# Altium PCB Satellite_4U_Laser_Int_Ext_V11.PcbDoc (part 2 of 2)
Units mm, origin at the board's own origin, x right, y up, seen from the top; angles counter-clockwise.
Board outline 82 x 80 mm, 4 copper layers (L1_TOP, L2_SIGNAL, L3_GND, L4_BOT), stack 1.584 mm thick; 192 components, 101 nets, 642 pads, 592 vias.
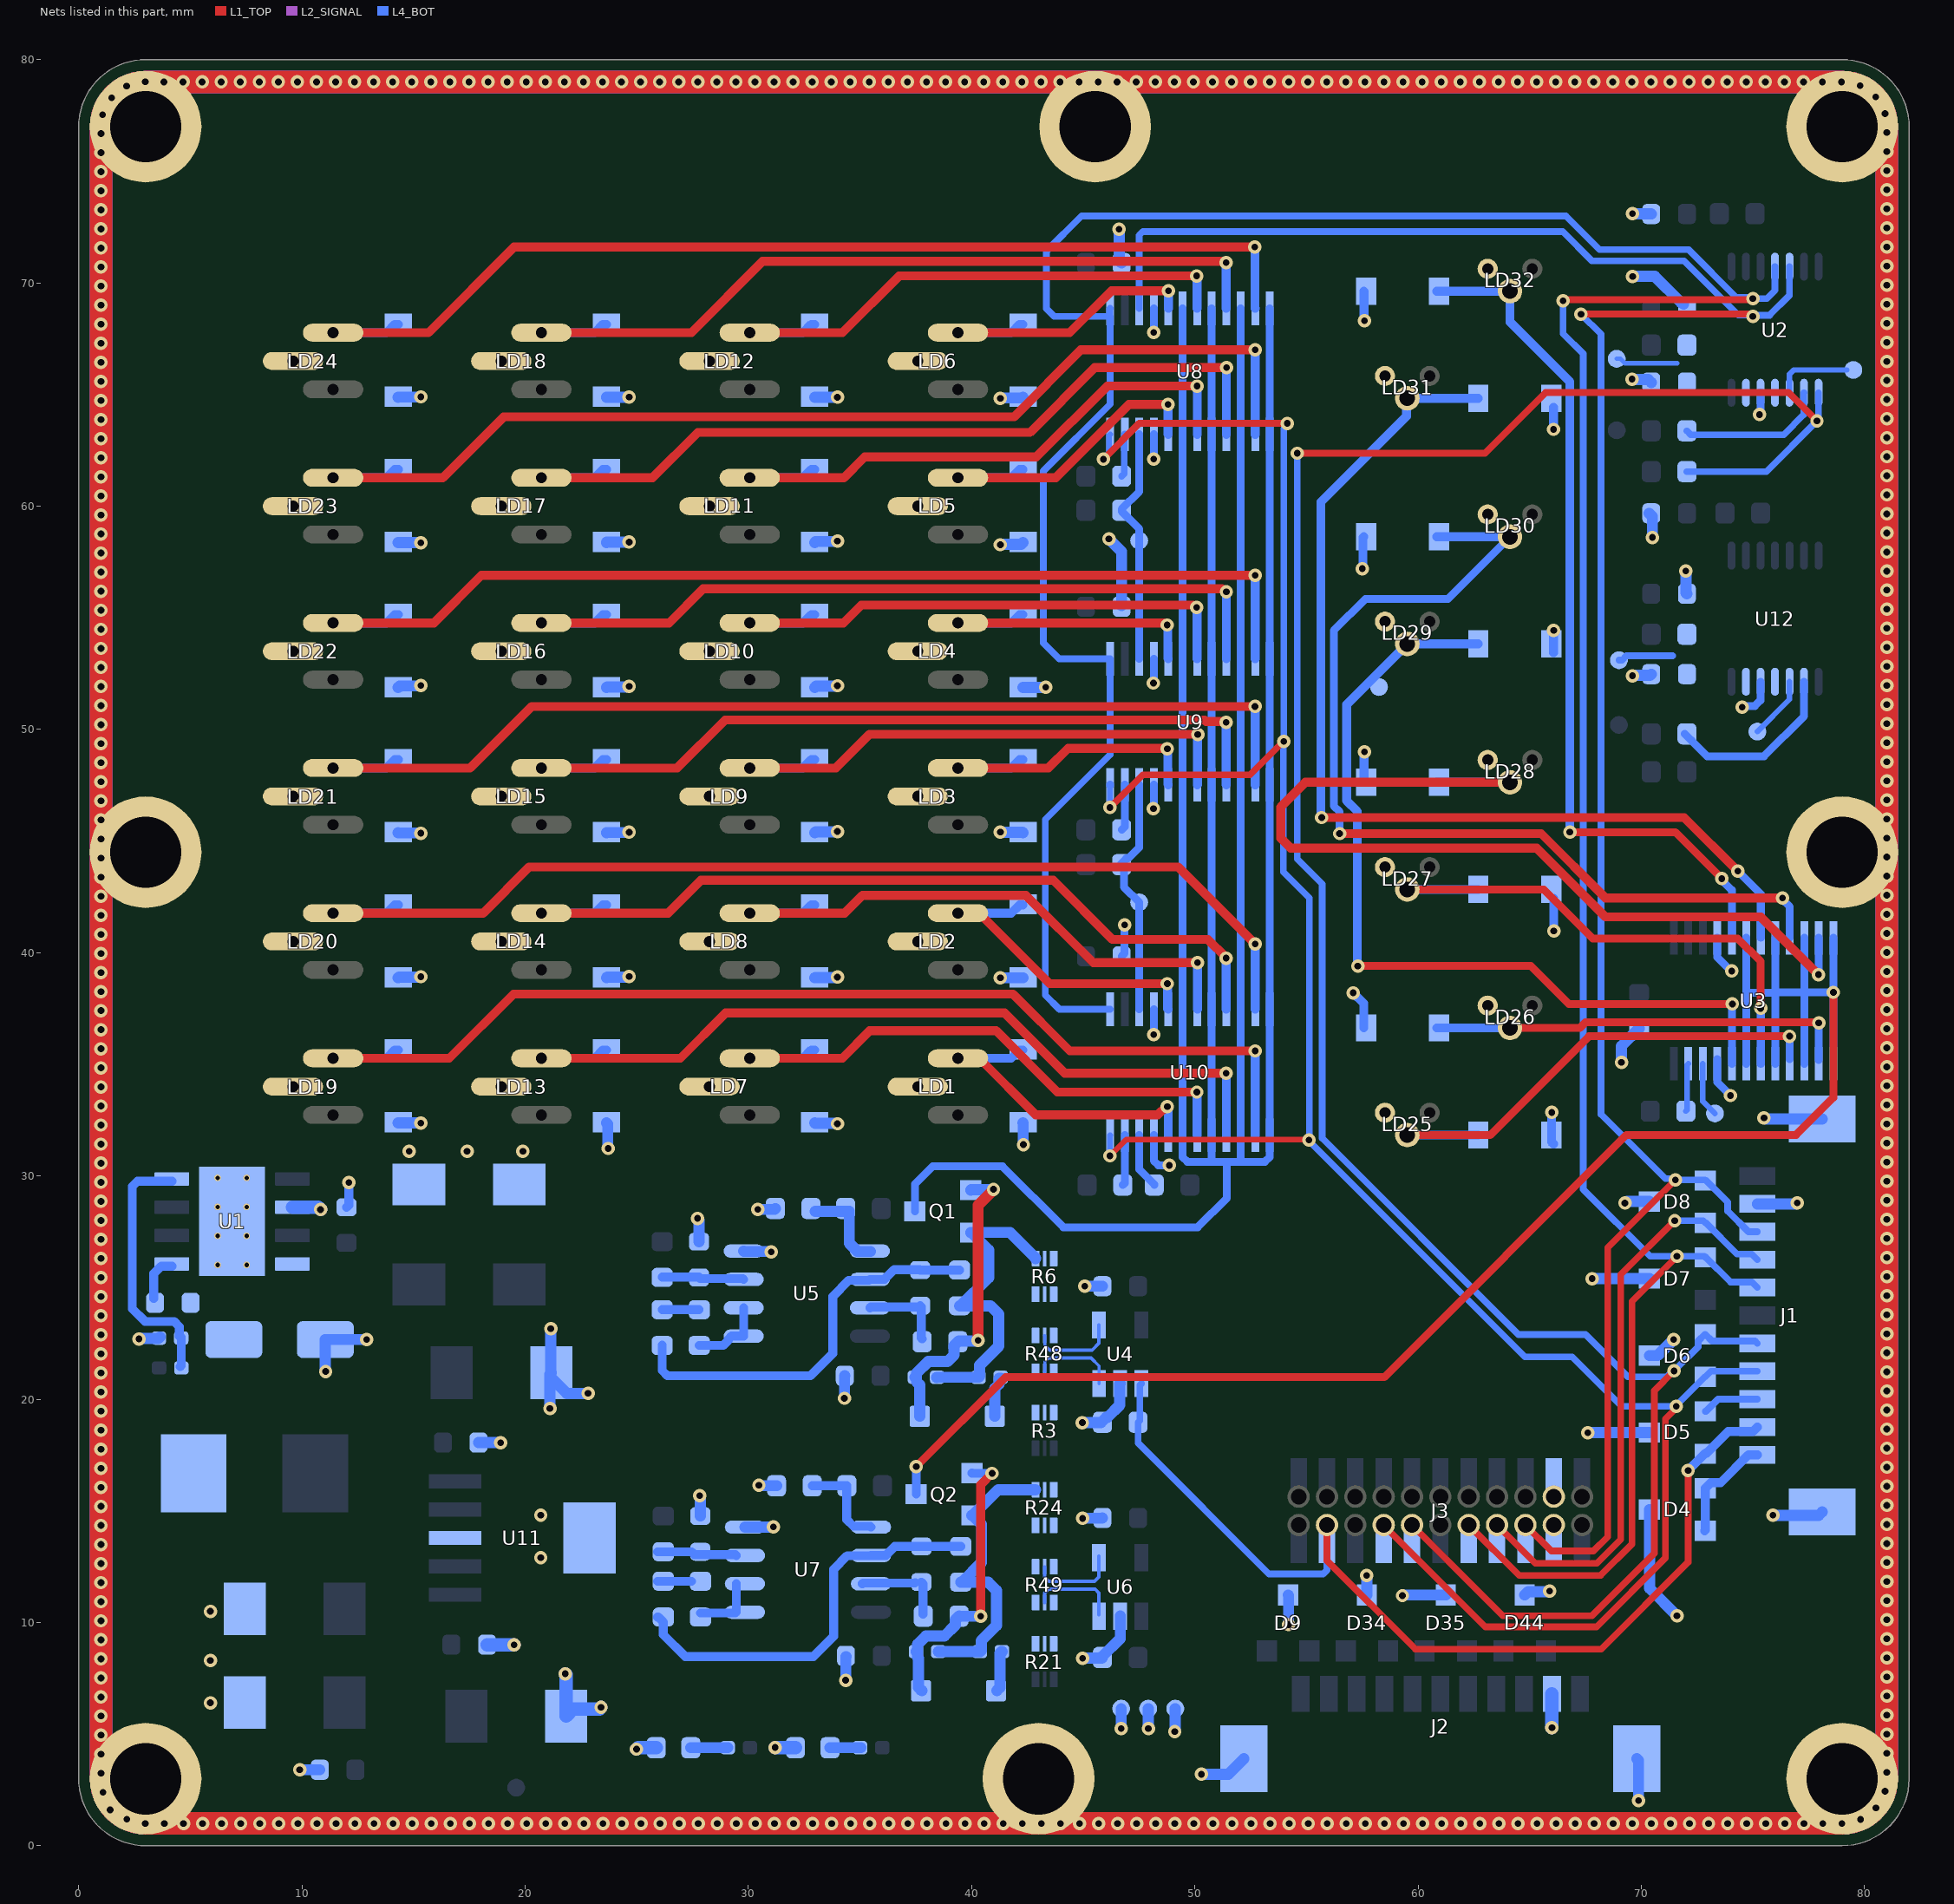
[diagram p4: the nets of this part, all layers, seen from the top]

## Via types
v1: diameter 0.6, hole 0.3, L1_TOP to L4_BOT, tented both sides, 592 vias

## Nets (pads, with @x,y where several pads share a name; then routed paths per layer and width w, separated by ;. In a path a pad name is that pad's centre, name@x,y a point inside that pad or via, vN(x,y) a via of type N, cw(c..) or ccw(c..) an arc to the next point about the centre after c; other vN are vias at no path point) (continued)
GND: C2.1 C3.2 C4.1 C5.1 C6.2 C9.1 C10.1 C14.1 C16.1 C17.2 C18.2 C19.2 C20.1 C21.2 C23.1 C25.1 C26.1 C33.1 C43.1 C49.1 C51.1 C53.1 C55.1 C58.1 C59.1 C60.1 D1.2 D2.1 D3.1 D4.3 D5.3 D6.3 D7.3 D8.3 D9.3 D10.1 D11.1 D12.1 D13.1 D14.1 D15.1 D16.1 D17.1 D18.1 D19.1 D20.1 D21.1 D22.1 D23.1 D24.1 D25.1 D26.1 D27.1 D28.1 D29.1 D30.1 D31.1 D32.1 D33.1 D34.3 D35.3 D36.1 D37.1 D38.1 D39.1 D40.1 D41.1 D42.1 D43.1 D44.3 H1.1 H2.1 H3.1 H4.1 H5.1 H6.1 H7.1 H8.1 J1.2 J1.M1 J1.M2 J2.2 J2.M1 J2.M2 J3.03 J3.04 LD1.2 LD2.2 LD3.2 LD4.2 LD5.2 LD6.2 LD7.2 LD8.2 LD9.2 LD10.2 LD11.2 LD12.2 LD13.2 LD14.2 LD15.2 LD16.2 LD17.2 LD18.2 LD19.2 LD20.2 LD21.2 LD22.2 LD23.2 LD24.2 LD25.1 LD26.1 LD27.1 LD28.1 LD29.1 LD30.1 LD31.1 LD32.1 R4.1 R11.2 R16.2 R23.2 R28.2 TP15.1 TP18.1 TP19.1 U1.6 U1.9 U2.12 U3.4 U3.21 U4.2 U5.4 U6.2 U7.4 U8.4 U8.21 U9.4 U9.21 U10.4 U10.21 U11.3 U11.6 U12.12 | length 1073.3
  L1_TOP w1: H1.1@1,3 ccw(c3,3) 3,1 79,1 ccw(c79,3) H3.1@81,2.996 ; H1.1@1,3.005 1,10.075 1,10.929 1,24.593 1,25.447 1,39.965 1,40.819 1,54.483 1,55.337 1,69.001 1,69.855 1,77 cw(c3,77) 3,79 79,79 cw(c79,77) 81,77 81,69.9 81,69.046 81,55.382 81,54.528 81,40.01 81,39.156 81,25.492 81,24.638 81,10.974 81,10.12 H3.1@81,3
  L2_SIGNAL w1: H1.1@1,3 ccw(c3,3) 3,1 79,1 ccw(c79,3) H3.1@81,2.996 ; H1.1@1,3.005 1,10.075 1,10.929 1,24.593 1,25.447 1,39.965 1,40.819 1,54.483 1,55.337 1,69.001 1,69.855 1,77 cw(c3,77) 3,79 79,79 cw(c79,77) 81,77 81,69.9 81,69.046 81,55.382 81,54.528 81,40.01 81,39.156 81,25.492 81,24.638 81,10.974 81,10.12 H3.1@81,3
  L4_BOT w0.35: C55.1@46.721,39.836 46.857,39.971 v1(46.857,41.241) ; v1(48.147,46.445) 48.159,46.457 U9.21@48.159,47.523 ; v1(48.148,52.074) 48.159,52.086 U9.4@48.159,53.162 ; v1(48.157,62.103) 48.159,62.106 U8.21@48.159,63.221 ; U10.21@48.159,31.826 48.159,30.681 48.364,30.476 v1(48.854,30.476) ; v1(48.158,36.328) 48.159,36.329 U10.4@48.159,37.465 ; U8.4@48.159,68.859 48.159,67.785 v1(48.163,67.781) ; U3.21@73.406,35.223 U3.21@73.406,35.023 73.406,34.194 v1@73.99,33.61 ; U3.4@73.406,40.662 73.406,39.795 v1@74.023,39.177 ; v1(74.522,51.001) 74.569,51.048 75.092,51.048 75.341,51.297 U12.12@75.341,52.135 ; v1(75.3,64.1) 75.3,64.114 75.341,64.155 U2.12@75.341,65.08
  L4_BOT w0.4: C2.1@12,28.6 12.1,28.7 v1(12.1,29.7) ; v1(57.1,38.2) 57.57,37.73 D42.1@57.57,36.63 ; v1(57.5,57.2) 57.535,57.235 57.535,58.595 D38.1@57.57,58.63 ; D40.1@57.57,47.63 57.585,47.645 57.585,48.985 v1(57.6,49) ; D36.1@57.57,69.63 57.585,69.615 57.585,68.315 v1(57.6,68.3) ; v1(65.992,32.846) 65.981,32.835 65.981,31.519 D43.1@66.07,31.43 ; v1(66.068,63.439) 66.07,63.441 D37.1@66.07,64.43 ; D41.1@66.07,42.43 66.076,42.424 66.076,40.975 v1(66.082,40.969) ; D39.1@66.07,53.43 66.07,54.429 v1(66.078,54.437)
  L4_BOT w0.5: v1(2.7,22.7) 2.719,22.719 3.572,22.719 R4.1@3.641,22.788 ; v1(9.9,3.4) C4.1@10.799,3.4 ; v1(11.065,21.242) 11.049,21.258 D1.2@11.049,22.671 12.896,22.671 v1(12.898,22.67) ; D31.1@14.314,32.373 14.316,32.371 v1(15.33,32.369) v1(15.33,32.369) ; D29.1@14.314,38.873 14.345,38.904 15.311,38.904 v1(15.33,38.923) ; D23.1@14.314,45.373 14.326,45.361 15.318,45.361 v1(15.33,45.349) ; D21.1@14.314,51.873 14.387,51.946 15.311,51.946 v1(15.33,51.965) ; D15.1@14.314,58.373 14.32,58.367 15.324,58.367 v1(15.33,58.361) ; D13.1@14.314,64.873 14.325,64.884 15.319,64.884 v1(15.33,64.894) ; C20.1@17.914,18.056 18.89,18.056 v1(18.902,18.044) ; v1(21.11,19.58) 21.11,21.118 C21.2@21.177,21.185 21.15,21.212 v1(21.15,23.16) ; C21.2@21.177,20.95 21.867,20.26 v1(22.82,20.26) ; D33.1@23.644,32.373 23.701,32.316 23.701,31.249 v1(23.72,31.23) ; D28.1@23.644,38.873 23.679,38.908 24.641,38.908 v1(24.66,38.927) ; D25.1@23.644,45.373 23.654,45.383 24.65,45.383 v1(24.66,45.393) ; D20.1@23.644,51.873 23.676,51.905 24.641,51.905 v1(24.66,51.924) ; D17.1@23.644,58.373 23.653,58.382 24.651,58.382 v1(24.66,58.39) ; D12.1@23.644,64.873 23.648,64.877 24.656,64.877 v1(24.66,64.881) ; v1(27.72,28.1) 27.79,28.03 C9.1@27.79,27.055 ; v1(27.82,15.68) 27.844,15.656 C14.1@27.844,14.764 ; U5.4@29.791,26.636 29.81,26.617 31.003,26.617 v1(31.02,26.6) ; U7.4@29.845,14.271 31.111,14.271 v1(31.12,14.28) ; v1(30.42,28.5) 31.166,28.5 R16.2@31.207,28.541 ; v1(30.47,16.148) 30.495,16.123 R23.2@31.261,16.123 ; D32.1@32.974,32.373 32.992,32.355 33.972,32.355 v1(33.99,32.337) ; D27.1@32.974,38.873 32.99,38.889 33.974,38.889 v1(33.99,38.905) ; D24.1@32.974,45.373 33.011,45.41 33.971,45.41 v1(33.99,45.429) ; D19.1@32.974,51.873 33.039,51.938 33.971,51.938 v1(33.99,51.957) ; D16.1@32.974,58.373 33.019,58.418 33.971,58.418 v1(33.99,58.437) ; D11.1@32.974,64.873 32.976,64.875 33.988,64.875 v1(33.99,64.878) ; v1(34.3,20.04) 34.309,20.049 34.309,21.039 C10.1@34.318,21.048 ; v1(34.36,7.41) 34.366,7.416 34.366,8.463 C33.1@34.372,8.469 ; v1(41.288,45.406) 41.304,45.389 42.288,45.389 D22.1@42.304,45.373 ; v1(41.288,58.271) 41.307,58.29 42.221,58.29 D14.1@42.304,58.373 ; v1(41.288,64.828) 41.307,64.848 42.279,64.848 D10.1@42.304,64.873 ; v1(41.288,38.874) D26.1@42.304,38.873 ; D30.1@42.304,32.373 42.312,32.365 42.312,31.408 v1(42.32,31.4) ; D18.1@42.304,51.873 42.314,51.883 43.31,51.883 v1(43.32,51.893) ; v1(44.96,18.95) 44.967,18.957 45.801,18.957 46.033,19.189 46.088,19.189 46.641,19.741 46.641,20.682 U4.2@46.661,20.702 ; v1(44.97,8.39) 44.988,8.408 45.839,8.408 R28.2@45.858,8.427 45.858,8.477 46.661,9.28 U6.2@46.661,10.283 ; v1(44.97,14.66) 44.98,14.671 45.848,14.671 C43.1@45.858,14.681 ; v1(45.07,25.06) C23.1@45.858,25.06 ; v1(46.151,58.532) 46.722,57.961 C53.1@46.722,55.549 ; v1(46.6,72.4) 46.619,72.381 46.619,70.992 C49.1@46.722,70.89 ; v1(46.7,5.25) TP15.1@46.7,6.139 ; TP19.1@47.914,6.139 47.916,6.137 47.916,5.252 v1(47.918,5.25) ; v1(49.1,5.115) 49.114,5.129 49.114,6.126 TP18.1@49.127,6.139 ; v1(50.3,3.2) 51.5,3.2 J2.M2@52.2,3.9 ; D9.3@54.18,11.229 54.2,11.209 v1(54.2,9.9) ; v1(57.7,12.1) 57.706,12.094 57.706,11.235 D34.3@57.713,11.229 ; v1(59.3,11.2) 59.327,11.2 59.356,11.229 D35.3@61.246,11.229 ; D44.3@64.779,11.229 64.931,11.381 65.881,11.381 v1(65.9,11.4) ; v1(67.6,18.5) 67.603,18.503 70.369,18.503 D5.3@70.372,18.505 ; v1(67.8,25.4) D7.3@70.372,25.4 ; v1(69.112,35.085) 69.112,35.812 C51.1@69.9,36.6 ; v1(69.267,28.783) 69.294,28.783 69.368,28.857 70.363,28.857 D8.3@70.372,28.848 ; v1(69.585,65.688) 69.605,65.669 70.316,65.669 C25.1@70.447,65.538 ; v1(69.6,52.4) 69.619,52.419 70.392,52.419 C59.1@70.447,52.474 ; v1(69.6,73.1) 69.607,73.093 70.44,73.093 C16.1@70.447,73.085 ; v1(69.612,70.291) 69.621,70.3 70.6,70.3 71.788,69.112 71.897,69.112 C26.1@71.897,69.048 ; J2.M1@69.8,3.9 69.877,3.823 v1(69.877,2.023) ; C58.1@70.355,59.677 70.5,59.532 v1(70.5,58.6) ; D4.3@70.372,15.058 70.372,11.528 v1(71.6,10.3) ; D6.3@70.372,21.953 70.73,21.953 v1(71.448,22.67) ; v1@72.008,57.092 72.008,56.115 C60.1@72.047,56.076 ; J1.2@75.2,28.75 76.942,28.75 v1(76.984,28.793) ; v1(75.5,32.6) 75.527,32.6 75.577,32.55 J1.M1@78.1,32.55 ; v1(75.9,14.8) 77.95,14.8 J1.M2@78.1,14.95
  L4_BOT w0.6: U1.6@9.573,28.598 10.729,28.598 v1(10.832,28.494) ; C5.1@18.295,9.006 18.3,9 v1(19.5,9) ; v1(21.8,7.7) 21.835,7.665 C19.2@21.835,5.8 22.159,6.124 23.324,6.124 v1(23.4,6.2) ; v1(24.991,4.325) 25.056,4.39 D3.1@25.873,4.39 ; v1(31.2,4.4) 32.099,4.4 D2.1@32.109,4.39 ; v1(66,5.284) J2.2@66,6.8
  L4_BOT w1: H1.1@1,3 ccw(c3,3) 3,1 79,1 ccw(c79,3) H3.1@81,2.996 ; H1.1@1,3.005 1,10.075 1,10.929 1,24.593 1,25.447 1,39.965 1,40.819 1,54.483 1,55.337 1,69.001 1,69.855 1,77 cw(c3,77) 3,79 79,79 cw(c79,77) 81,77 81,69.9 81,69.046 81,55.382 81,54.528 81,40.01 81,39.156 81,25.492 81,24.638 81,10.974 81,10.12 H3.1@81,3
  other v1: 2.986,0.996 3.84,0.997 4.694,0.997 5.548,0.997 6.402,0.997 7.256,0.997 8.11,0.997 8.964,0.997 9.818,0.997 10.672,0.997 11.526,0.997 12.38,0.997 13.234,0.997 14.088,0.997 14.942,0.997 15.796,0.997 16.65,0.997 17.504,0.997 18.358,0.997 19.212,0.997 20.066,0.997 20.92,0.997 21.774,0.997 22.628,0.997 23.482,0.997 24.336,0.997 25.19,0.997 26.044,0.997 26.898,0.997 27.752,0.997 28.606,0.997 29.46,0.997 30.314,0.997 31.168,0.997 32.022,0.997 32.876,0.997 33.73,0.997 34.584,0.997 35.438,0.997 36.292,0.997 37.146,0.997 38,0.997 38.854,0.997 39.708,0.997 40.562,0.997 41.416,0.997 42.27,0.997 43.124,0.997 43.978,0.997 44.832,0.997 45.686,0.997 46.54,0.997 47.394,0.997 48.248,0.997 49.102,0.997 49.956,0.997 50.81,0.997 51.664,0.997 52.518,0.997 53.372,0.997 54.226,0.997 55.08,0.997 55.934,0.997 56.788,0.997 57.642,0.997 58.496,0.997 59.35,0.997 60.204,0.997 61.058,0.997 61.912,0.997 62.766,0.997 63.62,0.997 64.474,0.997 65.328,0.997 66.182,0.997 67.036,0.997 67.89,0.997 68.744,0.997 69.598,0.997 70.452,0.997 71.306,0.997 72.16,0.997 73.014,0.997 73.868,0.997 74.722,0.997 75.576,0.997 76.43,0.997 77.284,0.997 78.138,0.997 78.992,0.997 79.827,1.178 2.154,1.186 1.408,1.602 80.511,1.689 1.089,2.394 80.922,2.438 0.997,3.243 81.003,3.288 0.997,4.097 81.003,4.142 0.997,4.951 81.003,4.996 0.997,5.805 81.003,5.85 5.9,6.4 0.997,6.659 81.003,6.704 0.997,7.513 81.003,7.558 5.9,8.3 0.997,8.367 81.003,8.412 0.997,9.221 81.003,9.266 0.997,10.075 81.003,10.12 5.9,10.5 0.997,10.929 81.003,10.974 0.997,11.783 81.003,11.828 0.997,12.637 81.003,12.682 20.7,12.9 0.997,13.491 81.003,13.536 0.997,14.345 81.003,14.39 20.7,14.8 0.997,15.199 81.003,15.244 0.997,16.053 81.003,16.098 0.997,16.907 81.003,16.952 0.997,17.761 81.003,17.806 0.997,18.615 81.003,18.66 0.997,19.469 81.003,19.514 0.997,20.323 81.003,20.368 0.997,21.177 81.003,21.222 0.997,22.031 81.003,22.076 0.997,22.885 81.003,22.93 0.997,23.739 81.003,23.784 0.997,24.593 81.003,24.638 0.997,25.447 81.003,25.492 0.997,26.301 81.003,26.346 0.997,27.155 81.003,27.2 0.997,28.009 81.003,28.054 0.997,28.863 81.003,28.908 0.997,29.717 81.003,29.762 0.997,30.571 81.003,30.616 14.8,31.1 17.4,31.1 19.9,31.1 0.997,31.425 81.003,31.47 0.997,32.279 81.003,32.324 0.997,33.133 81.003,33.178 74,33.6 0.997,33.987 81.003,34.032 0.997,34.841 81.003,34.886 0.997,35.695 81.003,35.74 0.997,36.549 81.003,36.594 0.997,37.403 81.003,37.448 0.997,38.257 81.003,38.302 0.997,39.111 74.053,39.177 81.003,39.156 0.997,39.965 81.003,40.01 0.997,40.819 81.003,40.864 0.997,41.673 81.003,41.718 0.997,42.527 81.003,42.572 0.997,43.381 81.003,43.426 0.997,44.235 81.003,44.28 0.997,45.089 81.003,45.134 0.997,45.943 81.003,45.988 0.997,46.797 81.003,46.842 0.997,47.651 81.003,47.696 0.997,48.505 81.003,48.55 0.997,49.359 81.003,49.404 0.997,50.213 81.003,50.258 0.997,51.067 81.003,51.112 0.997,51.921 81.003,51.966 0.997,52.775 81.003,52.82 0.997,53.629 81.003,53.674 0.997,54.483 81.003,54.528 0.997,55.337 81.003,55.382 0.997,56.191 81.003,56.236 0.997,57.045 72,57.1 81.003,57.09 0.997,57.899 81.003,57.944 0.997,58.753 81.003,58.798 0.997,59.607 81.003,59.652 0.997,60.461 81.003,60.506 0.997,61.315 81.003,61.36 0.997,62.169 81.003,62.214 0.997,63.023 81.003,63.068 0.997,63.877 81.003,63.922 0.997,64.731 81.003,64.776 0.997,65.585 81.003,65.63 0.997,66.439 81.003,66.484 0.997,67.293 81.003,67.338 0.997,68.147 81.003,68.192 0.997,69.001 81.003,69.046 0.997,69.855 81.003,69.9 0.997,70.709 81.003,70.754 0.997,71.563 81.003,71.608 0.997,72.417 81.003,72.462 0.997,73.271 81.003,73.316 0.997,74.125 81.003,74.17 0.997,74.979 81.003,75.024 0.997,75.833 81.003,75.878 0.997,76.687 81.003,76.732 1.072,77.537 80.917,77.581 1.473,78.292 80.498,78.325 2.149,78.813 79.809,78.83 2.981,79.005 3.821,79.003 4.675,79.003 5.529,79.003 6.383,79.003 7.237,79.003 8.091,79.003 8.945,79.003 9.799,79.003 10.653,79.003 11.507,79.003 12.361,79.003 13.215,79.003 14.069,79.003 14.923,79.003 15.777,79.003 16.631,79.003 17.485,79.003 18.339,79.003 19.193,79.003 20.047,79.003 20.901,79.003 21.755,79.003 22.609,79.003 23.463,79.003 24.317,79.003 25.171,79.003 26.025,79.003 26.879,79.003 27.733,79.003 28.587,79.003 29.441,79.003 30.295,79.003 31.149,79.003 32.003,79.003 32.857,79.003 33.711,79.003 34.565,79.003 35.419,79.003 36.273,79.003 37.127,79.003 37.981,79.003 38.835,79.003 39.689,79.003 40.543,79.003 41.397,79.003 42.251,79.003 43.105,79.003 43.959,79.003 44.813,79.003 45.667,79.003 46.521,79.003 47.375,79.003 48.229,79.003 49.083,79.003 49.937,79.003 50.791,79.003 51.645,79.003 52.499,79.003 53.353,79.003 54.207,79.003 55.061,79.003 55.915,79.003 56.769,79.003 57.623,79.003 58.477,79.003 59.331,79.003 60.185,79.003 61.039,79.003 61.893,79.003 62.747,79.003 63.601,79.003 64.455,79.003 65.309,79.003 66.163,79.003 67.017,79.003 67.871,79.003 68.725,79.003 69.579,79.003 70.433,79.003 71.287,79.003 72.141,79.003 72.995,79.003 73.849,79.003 74.703,79.003 75.557,79.003 76.411,79.003 77.265,79.003 78.119,79.003 78.973,79.003
I_LD_EXT: Q2.3 U3.6 U3.8 U3.10 U3.12 U3.13 U3.15 U3.17 U3.19 | length 80.3
  L1_TOP w0.35: v1(37.52,16.98) 41.524,20.984 58.484,20.984 69.334,31.834 76.934,31.834 78.606,33.506 v1(78.606,38.223)
  L4_BOT w0.35: U3.19@74.706,35.023 74.706,35.701 74.706,38.181 ; U3.6@74.706,40.662 74.706,38.181 ; U3.17@76.006,35.023 76.006,38.202 ; U3.8@76.006,40.662 76.006,38.223 ; U3.15@77.306,35.023 77.306,38.223 ; U3.10@77.306,40.662 77.306,38.223 ; U3.13@78.606,35.023 v1(78.606,38.223) ; U3.12@78.606,40.662 v1(78.606,38.223) ; 74.706,38.181 74.727,38.202 76.006,38.202 ; 76.006,38.202 76.006,38.223 ; 76.006,38.223 77.306,38.223 ; 77.306,38.223 v1(78.606,38.223)
  L4_BOT w0.4: Q2.3@37.52,15.746 v1(37.52,16.98)
I_LD_INT: Q1.3 U8.6 U8.8 U8.10 U8.12 U8.13 U8.15 U8.17 U8.19 U9.6 U9.8 U9.10 U9.12 U9.13 U9.15 U9.17 U9.19 U10.6 U10.8 U10.10 U10.12 U10.13 U10.15 U10.17 U10.19 | length 175.3
  L4_BOT w0.35: Q1.3@37.462,28.414 37.462,29.632 38.26,30.43 41.388,30.43 44.118,27.7 50.13,27.7 51.435,29.005 51.435,30.632 ; U8.6@49.459,68.859 49.459,68.284 U8.19@49.459,63.221 49.459,58.947 U9.6@49.459,53.162 49.459,52.587 U9.19@49.459,47.523 49.459,42.494 U10.6@49.459,37.465 49.459,34.646 U10.19@49.459,31.826 49.459,30.84 49.667,30.632 50.767,30.632 ; U9.8@50.759,53.162 U9.17@50.759,47.523 U10.8@50.759,37.465 U10.17@50.759,31.826 50.759,30.64 50.767,30.632 ; U9.8@50.759,53.18 U8.17@50.759,63.203 ; U8.17@50.759,63.221 U8.8@50.759,68.859 ; U8.10@52.059,68.859 U8.15@52.059,63.221 U9.10@52.059,53.162 U9.15@52.059,47.523 U10.10@52.059,37.465 U10.15@52.059,31.826 52.059,30.632 ; U8.12@53.359,68.859 U8.13@53.359,63.221 U9.12@53.359,53.162 U9.13@53.359,47.523 U10.12@53.359,37.465 U10.13@53.359,31.826 53.359,30.85 53.141,30.632 52.059,30.632 ; 50.767,30.632 51.435,30.632 ; 51.435,30.632 52.059,30.632
INT_LASER_ADC: D5.2 J1.10 J3.20 R11.1 U4.1 | length 43.8
  L1_TOP w0.3: J3.20@55.92,14.365 55.92,12.765 59.885,8.8 68.201,8.8 72.1,12.699 v1(72.1,16.804)
  L4_BOT w0.3: U4.1@47.611,20.702 47.534,20.625 47.534,19.04 R11.1@47.458,18.964 47.458,18.039 53.328,12.169 55.744,12.169 55.92,12.345 J3.20@55.92,13.387
  L4_BOT w0.4: v1(72.1,16.804) 72.1,16.809 72.876,17.585 72.926,17.585 73.891,18.55 75,18.55 J1.10@75.2,18.75
LATCH: D6.1 J1.7 J3.14 R13.1 U2.8 | length 111.4
  L1_TOP w0.3: v1(54.584,62.37) 62.997,62.37 65.714,65.088 76.603,65.088 v1(77.872,63.82) ; J3.14@59.73,14.365 63.795,10.3 67.788,10.3 70.586,13.098 70.586,20.383 v1(71.47,21.267)
  L4_BOT w0.3: v1(54.584,62.37) 54.584,44.196 55.71,43.07 55.71,31.683 64.496,22.896 67.5,22.896 69.4,20.996 71.145,20.996 71.416,21.267 v1(71.47,21.267) 72.547,22.343 72.547,22.603 72.847,22.903 D6.1@72.872,22.903 73.172,22.603 75.097,22.603 J1.7@75.2,22.5 ; R13.1@72.047,61.549 75.601,61.549 v1(77.872,63.82) 77.872,63.901 77.941,63.97 U2.8@77.941,65.08
MISO_LD: D8.2 J1.4 J3.08 | length 26.4
  L1_TOP w0.3: J3.08@63.54,14.365 65.254,12.651 68.017,12.651 69.086,13.719 69.086,25.586 v1(71.5,28)
  L4_BOT w0.3: v1(71.5,28) 72.769,28 D8.2@72.872,27.898 72.897,27.898 74.294,26.5 74.95,26.5 J1.4@75.2,26.25
MOSI_LD: D8.1 J1.3 J3.06 U2.5 U8.3 | length 110.8
  L1_TOP w0.3: J3.06@64.81,14.365 65.975,13.2 67.859,13.2 68.5,13.841 68.5,26.784 v1(71.533,29.817) ; v1(67.3,68.6) 67.308,68.608 74.811,68.608 74.919,68.5 v1(75,68.5)
  L4_BOT w0.3: U8.3@47.509,68.859 47.504,68.864 47.504,72.124 47.68,72.3 66.478,72.3 67.79,70.988 71.912,70.988 74.343,68.557 74.943,68.557 v1(75,68.5) 75.05,68.55 75.75,68.55 76.641,69.441 U2.5@76.641,70.73 ; v1(67.3,68.6) 68.2,67.7 68.2,32.751 71.077,29.875 71.476,29.875 v1(71.533,29.817) ; v1@71.533,29.862 71.577,29.817 72.852,29.817 D8.1@72.872,29.798 ; D8.1@72.897,29.798 73.873,28.821 73.873,28.427 74.8,27.5 J1.3@75.2,27.5
NetC1_1: C1.1 D1.1 L1.1 U1.8
NetC1_2: C1.2 U1.1 | length 2
  L4_BOT w0.4: C1.2@3.366,24.522 3.366,25.626 3.698,25.958 U1.1@4.173,25.958
NetC9_2: C9.2 R25.2 U5.3 | length 3.7
  L4_BOT w0.4: R25.2@26.139,25.465 C9.2@27.79,25.465 ; C9.2@27.79,25.455 27.841,25.404 29.753,25.404 U5.3@29.791,25.366
NetC14_2: C14.2 R26.2 U7.3 | length 3.6
  L4_BOT w0.4: R26.2@25.939,13.164 27.463,13.164 27.588,13.039 29.421,13.039 U7.3@29.459,13.001
NetC22_1: C22.1 R7.1 R14.2 U5.6 | length 18
  L4_BOT w0.4: 26.139,21.282 26.373,21.048 32.778,21.048 33.78,22.05 33.78,24.6 34.507,25.327 35.403,25.327 U5.6@35.441,25.366 36.095,25.366 36.53,25.8 37.681,25.8 C22.1@37.696,25.785 R7.1@39.462,25.785 ; 26.139,21.292 R14.2@26.139,22.417
NetC22_2: C22.2 R15.1 U5.7 | length 3.8
  L4_BOT w0.4: U5.7@35.441,24.096 35.479,24.134 37.645,24.134 C22.2@37.696,24.185 37.741,24.14 37.741,22.743 R15.1@37.785,22.699
NetC24_1: C24.1 R17.1 R20.2 U7.6 | length 18.4
  L4_BOT w0.4: R20.2@25.939,10.243 25.968,10.243 26.192,10.019 26.192,9.452 27.17,8.473 32.913,8.473 33.82,9.38 33.82,12.38 34.432,12.992 35.486,12.992 U7.6@35.495,13.001 36.149,13.001 36.553,13.405 C24.1@37.75,13.405 R17.1@39.515,13.405
NetC24_2: C24.2 R22.1 U7.7 | length 3.9
  L4_BOT w0.4: U7.7@35.109,11.731 35.146,11.768 37.459,11.768 C24.2@37.477,11.786 ; C24.2@37.75,11.805 37.826,11.729 R22.1@37.826,10.367
NetD2_2: D2.2 R1.1 | length 1.4
  L4_BOT w0.5: D2.2@33.659,4.39 R1.1@35.038,4.39
NetD3_2: D3.2 R5.1 | length 1.6
  L4_BOT w0.5: D3.2@27.423,4.39 R5.1@29.069,4.39
NetD4_1: D4.1 D4.2 J1.11 | length 4.9
  L4_BOT w0.4: D4.2@72.836,14.107 72.872,14.143 D4.1@72.872,16.008 73.122,16.258 73.558,16.258 74.8,17.5 J1.11@75.2,17.5
NetD5_1: D5.1 J1.9 | length 2.6
  L4_BOT w0.3: D5.1@72.872,19.455 72.897,19.455 73.441,20 J1.9@75.2,20
NetD10_2: D10.2 LD6.1 U8.5 | length 14.1
  L1_TOP w0.4: LD6.1@39.39,67.77 44.392,67.77 46.272,69.65 v1(48.818,69.65)
  L4_BOT w0.4: LD6.1@39.39,67.77 41.776,67.77 42.149,68.143 D10.2@42.304,68.143 ; U8.5@48.809,68.859 48.818,68.868 v1(48.818,69.65)
NetD11_2: D11.2 LD12.1 U8.7 | length 25.6
  L1_TOP w0.4: LD12.1@30.06,67.77 34.21,67.77 36.752,70.312 v1(50.083,70.312)
  L4_BOT w0.4: LD12.1@30.06,67.77 32.446,67.77 32.819,68.143 D11.2@32.974,68.143 ; v1(50.083,70.312) 50.096,70.299 50.096,68.872 U8.7@50.109,68.859
NetD12_2: D12.2 LD18.1 U8.9 | length 37.1
  L1_TOP w0.4: LD18.1@20.73,67.77 27.449,67.77 30.641,70.962 51.297,70.962 51.346,70.913 v1(51.4,70.913)
  L4_BOT w0.4: LD18.1@20.73,67.77 23.116,67.77 23.489,68.143 D12.2@23.644,68.143 ; v1(51.4,70.913) 51.405,70.909 51.405,68.864 U8.9@51.409,68.859
NetD13_2: D13.2 LD24.1 U8.11 | length 48.7
  L1_TOP w0.4: LD24.1@11.4,67.77 15.67,67.77 19.51,71.61 v1(52.688,71.61)
  L4_BOT w0.4: LD24.1@11.4,67.77 13.786,67.77 14.159,68.143 D13.2@14.314,68.143 ; v1(52.688,71.61) 52.698,71.599 52.698,68.87 U8.11@52.709,68.859
NetD14_2: D14.2 LD5.1 U8.20 | length 15.2
  L1_TOP w0.4: LD5.1@39.39,61.27 43.77,61.27 47.05,64.55 v1(48.801,64.55)
  L4_BOT w0.4: LD5.1@39.39,61.27 41.776,61.27 42.149,61.643 D14.2@42.304,61.643 ; v1(48.801,64.55) 48.805,64.546 48.805,63.225 U8.20@48.809,63.221
NetD15_2: D15.2 LD23.1 U8.14 | length 50.5
  L1_TOP w0.4: LD23.1@11.4,61.27 16.312,61.27 19.042,64 41.9,64 44.9,67 v1(52.7,67)
  L4_BOT w0.4: LD23.1@11.4,61.27 13.786,61.27 14.159,61.643 D15.2@14.314,61.643 ; v1(52.7,67) 52.704,66.995 52.704,63.225 U8.14@52.709,63.221
NetD16_2: D16.2 LD11.1 U8.18 | length 27
  L1_TOP w0.4: LD11.1@30.06,61.27 34.28,61.27 35.21,62.2 42.9,62.2 46.078,65.378 v1(50.106,65.378)
  L4_BOT w0.4: LD11.1@30.06,61.27 32.446,61.27 32.819,61.643 D16.2@32.974,61.643 ; v1(50.106,65.378) v1(50.106,65.378) 50.107,63.222 U8.18@50.109,63.221
NetD17_2: D17.2 LD17.1 U8.16 | length 38.8
  L1_TOP w0.4: LD17.1@20.73,61.27 25.701,61.27 27.731,63.3 42.615,63.3 45.518,66.203 v1(51.418,66.203)
  L4_BOT w0.4: LD17.1@20.73,61.27 23.116,61.27 23.489,61.643 D17.2@23.644,61.643 ; U8.16@51.409,63.221 51.413,63.225 51.413,66.199 v1(51.418,66.203)
NetD18_2: D18.2 LD4.1 U9.5 | length 14
  L1_TOP w0.4: LD4.1@39.39,54.77 48.618,54.77 48.711,54.677 v1(48.765,54.677)
  L4_BOT w0.4: LD4.1@39.39,54.77 41.776,54.77 42.149,55.143 D18.2@42.304,55.143 ; v1(48.765,54.677) 48.787,54.655 48.787,53.184 U9.5@48.809,53.162
NetD19_2: D19.2 LD10.1 U9.7 | length 25.8
  L1_TOP w0.4: LD10.1@30.06,54.77 34.26,54.77 35.06,55.57 49.921,55.57 50.03,55.461 v1(50.084,55.461)
  L4_BOT w0.4: LD10.1@30.06,54.77 32.446,54.77 32.819,55.143 D19.2@32.974,55.143 ; v1(50.084,55.461) 50.096,55.449 50.096,53.175 U9.7@50.109,53.162
NetD20_2: D20.2 LD16.1 U9.9 | length 37.4
  L1_TOP w0.4: LD16.1@20.73,54.77 26.449,54.77 27.979,56.3 51.218,56.3 51.358,56.16 v1(51.412,56.16)
  L4_BOT w0.4: LD16.1@20.73,54.77 23.116,54.77 23.489,55.143 D20.2@23.644,55.143 ; U9.9@51.409,53.162 51.41,53.164 51.41,56.159 v1(51.412,56.16)
NetD21_2: D21.2 LD22.1 U9.11 | length 49
  L1_TOP w0.4: LD22.1@11.4,54.77 15.908,54.77 18.038,56.9 v1(52.7,56.9)
  L4_BOT w0.4: LD22.1@11.4,54.77 13.786,54.77 14.159,55.143 D21.2@14.314,55.143 ; v1(52.7,56.9) 52.704,56.896 52.704,53.167 U9.11@52.709,53.162
NetD22_2: D22.2 LD3.1 U9.20 | length 14.4
  L1_TOP w0.4: LD3.1@39.39,48.27 43.444,48.27 44.323,49.149 48.753,49.149 v1(48.768,49.134)
  L4_BOT w0.4: LD3.1@39.39,48.27 41.776,48.27 42.149,48.643 D22.2@42.304,48.643 ; v1(48.768,49.134) 48.789,49.114 48.789,47.544 U9.20@48.809,47.523
NetD23_2: D23.2 LD21.1 U9.14 | length 49
  L1_TOP w0.4: LD21.1@11.4,48.27 17.536,48.27 20.295,51.029 v1(52.699,51.029)
  L4_BOT w0.4: LD21.1@11.4,48.27 13.786,48.27 14.159,48.643 D23.2@14.314,48.643 ; v1(52.699,51.029) 52.704,51.023 52.704,47.529 U9.14@52.709,47.523
NetD24_2: D24.2 LD9.1 U9.18 | length 26
  L1_TOP w0.4: LD9.1@30.06,48.27 33.925,48.27 35.439,49.784 50.123,49.784 v1(50.134,49.773)
  L4_BOT w0.4: LD9.1@30.06,48.27 32.446,48.27 32.819,48.643 D24.2@32.974,48.643 ; U9.18@50.109,47.523 50.121,47.536 50.121,49.76 v1(50.134,49.773)
NetD25_2: D25.2 LD15.1 U9.16 | length 37.5
  L1_TOP w0.4: LD15.1@20.73,48.27 26.807,48.27 28.96,50.423 50.442,50.423 50.507,50.358 51.361,50.358 v1(51.399,50.32)
  L4_BOT w0.4: LD15.1@20.73,48.27 23.116,48.27 23.489,48.643 D25.2@23.644,48.643 ; v1(51.399,50.32) 51.404,50.315 51.404,47.528 U9.16@51.409,47.523
NetD26_2: D26.2 LD2.1 U10.5 | length 14.9
  L1_TOP w0.4: LD2.1@39.39,41.77 40.34,41.77 43.498,38.612 v1(48.768,38.612)
  L4_BOT w0.4: LD2.1@39.39,41.77 41.776,41.77 42.149,42.143 D26.2@42.304,42.143 ; v1(48.768,38.612) 48.784,38.596 48.784,37.49 U10.5@48.809,37.465
NetD27_2: D27.2 LD8.1 U10.7 | length 26.8
  L1_TOP w0.4: LD8.1@30.06,41.77 34.31,41.77 35.11,42.57 42.43,42.57 45.448,39.552 v1(50.121,39.552)
  L4_BOT w0.4: LD8.1@30.06,41.77 32.446,41.77 32.819,42.143 D27.2@32.974,42.143 ; U10.7@50.109,37.465 50.115,37.471 50.115,39.546 v1(50.121,39.552)
NetD28_2: D28.2 LD14.1 U10.9 | length 38.1
  L1_TOP w0.4: LD14.1@20.73,41.77 26.403,41.77 27.873,43.24 43.66,43.24 46.309,40.591 50.595,40.591 51.403,39.783 v1(51.403,39.755)
  L4_BOT w0.4: LD14.1@20.73,41.77 23.116,41.77 23.489,42.143 D28.2@23.644,42.143 ; v1(51.403,39.755) 51.406,39.752 51.406,37.468 U10.9@51.409,37.465
NetD29_2: D29.2 LD20.1 U10.11 | length 49.6
  L1_TOP w0.4: LD20.1@11.4,41.77 18.119,41.77 20.189,43.84 49.251,43.84 v1(52.705,40.386)
  L4_BOT w0.4: LD20.1@11.4,41.77 13.786,41.77 14.159,42.143 D29.2@14.314,42.143 ; v1(52.705,40.386) 52.709,40.382 U10.11@52.709,37.465
NetD30_2: D30.2 LD1.1 U10.20 | length 15
  L1_TOP w0.4: LD1.1@39.39,35.27 40.34,35.27 42.88,32.73 48.338,32.73 48.714,33.105 v1(48.768,33.105)
  L4_BOT w0.4: LD1.1@39.39,35.27 41.776,35.27 42.149,35.643 D30.2@42.304,35.643 ; v1(48.768,33.105) 48.768,33.051 48.809,33.01 U10.20@48.809,31.826
NetD31_2: D31.2 LD19.1 U10.14 | length 50.4
  L1_TOP w0.4: LD19.1@11.4,35.27 16.601,35.27 19.474,38.143 41.857,38.143 44.4,35.6 v1(52.7,35.6)
  L4_BOT w0.4: LD19.1@11.4,35.27 13.786,35.27 14.159,35.643 D31.2@14.314,35.643 ; v1(52.7,35.6) 52.705,35.595 52.705,31.83 U10.14@52.709,31.826
NetD32_2: D32.2 LD7.1 U10.18 | length 26.7
  L1_TOP w0.4: LD7.1@30.06,35.27 34.21,35.27 35.44,36.5 41.1,36.5 43.845,33.755 v1(50.091,33.755)
  L4_BOT w0.4: LD7.1@30.06,35.27 32.446,35.27 32.819,35.643 D32.2@32.974,35.643 ; v1(50.091,33.755) 50.1,33.747 50.1,31.835 U10.18@50.109,31.826
NetD33_2: D33.2 LD13.1 U10.16 | length 38.5
  L1_TOP w0.4: LD13.1@20.73,35.27 26.955,35.27 28.985,37.3 41.473,37.3 44.173,34.6 v1(51.4,34.6)
  L4_BOT w0.4: LD13.1@20.73,35.27 23.116,35.27 23.489,35.643 D33.2@23.644,35.643 ; v1(51.4,34.6) 51.409,34.591 U10.16@51.409,31.826
NetD36_2: D36.2 LD32.3 U3.5 | length 39.1
  L1_TOP w0.35: v1(66.8,45.4) 71.526,45.4 v1(73.61,43.315)
  L4_BOT w0.35: v1(73.61,43.315) 73.61,43.248 74.056,42.802 U3.5@74.056,40.683
  L4_BOT w0.4: D36.2@60.84,69.63 LD32.3@64.12,69.63 64.12,68.24 66.8,65.56 v1(66.8,45.4)
NetD37_2: D37.2 LD31.3 U3.7 | length 46.6
  L1_TOP w0.4: v1(55.684,46.051) 55.685,46.05 71.928,46.05 v1(74.324,43.653)
  L4_BOT w0.35: v1(74.324,43.653) 75.356,42.622 U3.7@75.356,40.662
  L4_BOT w0.4: v1(55.684,46.051) 55.65,46.085 55.65,60.194 59.49,64.034 59.49,64.8 LD31.3@59.52,64.83 D37.2@62.7,64.83
NetD38_2: D38.2 LD30.3 U3.9 | length 45.1
  L1_TOP w0.4: v1(56.485,45.332) 65.516,45.332 68.404,42.444 v1(76.331,42.444)
  L4_BOT w0.35: v1(56.485,45.332) 56.485,46.309 56.225,46.568 56.225,54.425 57.651,55.851 61.341,55.851 LD30.3@64.12,58.63 ; v1(76.331,42.444) 76.331,42.377 76.656,42.052 U3.9@76.656,40.662
  L4_BOT w0.4: D38.2@60.84,58.63 LD30.3@64.12,58.63
NetD39_2: D39.2 LD29.3 TP14.1 U3.20 | length 39.3
  L1_TOP w0.35: v1(57.3,39.4) 65.053,39.4 66.753,37.7 v1(74.081,37.7)
  L4_BOT w0.35: U3.20@74.056,35.027 74.056,37.675 v1(74.081,37.7)
  L4_BOT w0.4: v1(57.3,39.4) 57.28,39.42 57.28,46.327 56.8,46.806 56.8,51.11 LD29.3@59.52,53.83 ; LD29.3@59.331,53.83 D39.2@62.7,53.83
NetD40_2: D40.2 LD28.3 U3.11 | length 43.7
  L1_TOP w0.4: LD28.3@64.12,47.63 54.962,47.63 53.852,46.52 53.852,45.132 54.301,44.682 65.318,44.682 68.4,41.6 75.357,41.6 v1(77.942,39.015)
  L4_BOT w0.35: v1(77.942,39.015) 77.956,39.029 U3.11@77.956,40.662
  L4_BOT w0.4: D40.2@60.84,47.63 LD28.3@64.12,47.63
NetD41_2: D41.2 LD27.3 U3.18 | length 24.9
  L1_TOP w0.35: LD27.3@59.52,42.83 65.631,42.83 67.824,40.637 74.314,40.637 75.347,39.605 75.347,37.511 v1(75.35,37.508)
  L4_BOT w0.35: v1(75.35,37.508) 75.356,37.502 U3.18@75.356,35.023
  L4_BOT w0.4: LD27.3@59.52,42.83 D41.2@62.7,42.83
NetD42_2: D42.2 LD26.3 U3.14 | length 18.9
  L1_TOP w0.35: LD26.3@64.12,36.63 67.252,36.63 67.505,36.883 77.922,36.883 v1(77.952,36.853)
  L4_BOT w0.35: v1(77.952,36.853) 77.956,36.849 U3.14@77.956,35.2
  L4_BOT w0.4: D42.2@60.84,36.63 LD26.3@64.12,36.63
NetD43_2: D43.2 LD25.3 U3.16 | length 23.2
  L1_TOP w0.35: LD25.3@59.52,31.83 63.23,31.83 67.658,36.258 v1(76.644,36.258)
  L4_BOT w0.35: v1(76.644,36.258) 76.656,36.246 U3.16@76.656,35.223
  L4_BOT w0.4: LD25.3@59.52,31.83 D43.2@62.7,31.83
NetDZ1_1: DZ1.1 R27.1 | length 1.9
  L4_BOT w0.5: DZ1.1@41.039,19.234 41.039,20.485 41.234,20.68 41.234,20.934 R27.1@41.309,20.934
NetDZ1_2: DZ1.2 Q1.1 R15.2 R29.1 | length 13.8
  L1_TOP w0.5: v1(40.29,22.63) 40.29,28.683 v1@40.98,29.373
  L4_BOT w0.5: R29.1@37.459,20.984 37.484,20.984 37.534,20.934 37.534,20.786 37.678,20.642 DZ1.2@37.678,19.231 ; R29.1@37.534,20.984 R29.1@37.534,21.162 ; R29.1@37.534,21.034 R29.1@37.534,21.162 ; Q1.1@39.962,29.364 39.98,29.382 40.962,29.382 v1(40.98,29.4) ; v1(40.29,22.63) 40.271,22.611 39.424,22.611 39.21,22.397 39.21,21.977 38.917,21.684 38.056,21.684 R29.1@37.534,21.162
NetDZ2_1: DZ2.1 R30.1 | length 1.9
  L4_BOT w0.5: DZ2.1@41.13,6.944 41.27,7.084 41.27,8.627 41.337,8.694 R30.1@41.363,8.694
NetDZ2_2: DZ2.2 Q2.1 R22.2 R31.1 | length 13.2
  L1_TOP w0.4: v1(40.41,10.28) 40.41,16.17 v1(40.92,16.68)
  L4_BOT w0.4: Q2.1@40.016,16.692 40.028,16.68 v1(40.92,16.68)
  L4_BOT w0.5: R31.1@37.513,8.694 R31.1@37.538,8.694 ; DZ2.2@37.769,6.941 37.617,7.093 37.617,8.406 37.588,8.436 37.588,8.644 R31.1@37.538,8.694 ; R22.2@39.439,10.281 39.264,10.106 39.264,9.874 38.784,9.394 37.957,9.394 37.588,9.025 37.588,8.744 R31.1@37.538,8.694 ; R22.2@39.439,10.281 v1(40.41,10.28)
NetQ1_2: Q1.2 R6.2 R6.4 R7.2 R27.2 R29.2 | length 14.5
  L4_BOT w0.5: R29.2@38.459,20.984 R27.2@40.309,20.984 40.315,20.984 40.365,21.034 40.365,21.525 41.22,22.38 41.22,23.81 40.845,24.185 R7.2@39.462,24.185 ; R7.2@39.512,24.185 40.77,25.443 40.77,26.681 39.987,27.464 Q1.2@39.962,27.464 39.969,27.47 41.717,27.47 42.867,26.32 R6.2@42.867,26.3
NetQ2_2: Q2.2 R17.2 R24.2 R24.4 R30.2 R31.2 | length 13.6
  L4_BOT w0.5: R31.2@38.512,8.694 R30.2@40.363,8.694 ; R17.2@39.515,11.805 40.74,11.805 41.11,11.435 41.11,9.86 40.438,9.188 40.438,8.744 40.388,8.694 R30.2@40.35,8.694 ; R17.2@39.565,11.805 40.448,12.687 40.448,14.385 Q2.2@40.041,14.792 ; R24.2@42.867,15.946 41.196,15.946 Q2.2@40.041,14.792 ; Q2.2@40.041,14.792 Q2.2@40.016,14.792 Q2.2@40.041,14.792
NetR2_1: R2.1 R4.2 U1.4 | length 11.7
  L4_BOT w0.4: U1.4@4.173,29.768 2.634,29.768 2.4,29.534 2.4,24.053 2.973,23.48 4.279,23.48 4.513,23.246 4.513,22.817 R4.2@4.591,22.738 ; R2.1@4.551,21.455 4.596,21.5 R4.2@4.596,22.766
NetR3_2: R3.2 R3.4 R48.1
NetR6_1: R6.1 R6.3 R48.2
NetR9_2: R9.2 R16.1 U5.5 | length 4
  L4_BOT w0.5: R16.1@32.997,28.414 34.356,28.414 34.521,28.414 34.521,26.983 34.887,26.617 U5.5@35.46,26.617
NetR10_1: R10.1 U5.1 U5.2 | length 3.5
  L4_BOT w0.4: R10.1@27.79,22.407 28.864,22.407 29.099,22.641 29.099,22.679 29.245,22.826 U5.1@29.791,22.826 U5.2@29.791,24.096
NetR10_2: R10.2 R14.1 | length 1.7
  L4_BOT w0.4: R14.1@26.139,24.017 R10.2@27.79,24.017
NetR12_1: R12.1 U2.9 | length 6.7
  L4_BOT w0.3: R12.1@72.047,63.373 72.22,63.2 76.38,63.2 77.281,64.101 77.281,65.07 U2.9@77.291,65.08
NetR18_2: R18.2 R23.1 U7.5 | length 4.3
  L4_BOT w0.4: R23.1@32.861,16.123 R18.2@34.374,16.123 ; R18.2@34.41,16.123 34.41,14.605 34.706,14.309 35.457,14.309 U7.5@35.495,14.271
NetR19_1: R19.1 U7.1 U7.2 | length 2.9
  L4_BOT w0.4: R19.1@27.857,10.423 29.421,10.423 29.459,10.461 U7.2@29.459,11.731
NetR19_2: R19.2 R20.1 | length 1.5
  L4_BOT w0.4: R20.1@25.939,11.843 R19.2@27.463,11.843
NetR21_2: R21.2 R21.4 R49.1
NetR24_1: R24.1 R24.3 R49.2
NetR39_1: R39.1 U8.23 | length 1.9
  L4_BOT w0.3: R39.1@46.722,61.341 46.834,61.453 46.834,63.196 U8.23@46.859,63.221
NetR40_1: R40.1 U3.23 | length 2.2
  L4_BOT w0.25: R40.1@72,32.9 72.056,32.956 72.056,34.973 U3.23@72.106,35.023
NetR42_1: R42.1 U9.23 | length 2.1
  L4_BOT w0.35: R42.1@46.722,45.506 46.859,45.643 U9.23@46.859,47.523
NetR44_1: R44.1 U10.23 | length 2.3
  L4_BOT w0.35: R44.1@46.774,29.591 46.859,29.676 U10.23@46.859,31.826
NetR46_1: R46.1 U12.9 | length 8
  L4_BOT w0.35: R46.1@71.955,49.8 71.955,49.796 72.246,49.505 72.25,49.505 72.955,48.8 75.5,48.8 77.291,50.591 U12.9@77.291,52.135
NetR48_3: R48.3 U4.3 | length 3.9
  L4_BOT w0.15: R48.3@43.272,21.249 43.282,21.259 43.282,21.682 43.451,21.852 45.348,21.852 45.711,21.489 U4.3@45.711,20.702
NetR48_4: R48.4 U4.4 | length 3.9
  L4_BOT w0.15: R48.4@43.272,22.849 43.282,22.839 43.282,22.416 43.496,22.202 45.402,22.202 45.706,22.506 U4.4@45.706,23.322
NetR49_3: R49.3 U6.3 | length 4
  L4_BOT w0.15: R49.3@43.267,10.89 43.277,10.9 43.277,11.324 43.447,11.493 45.537,11.493 45.706,11.324 U6.3@45.706,10.343
NetR49_4: R49.4 U6.4 | length 4
  L4_BOT w0.15: R49.4@43.272,12.495 43.272,12.028 43.457,11.843 45.503,11.843 45.701,12.041 U6.4@45.701,12.963
NetTP8_1: TP8.1 U2.10 | length 3.5
  L4_BOT w0.25: U2.10@76.641,65.08 76.641,65.907 76.834,66.1 TP8.1@79.209,66.1
NetTP13_1: TP13.1 U3.22 | length 2.4
  L4_BOT w0.25: U3.22@72.756,35.023 72.756,33.344 TP13.1@73.3,32.8
NetTP21_1: TP21.1 U12.10 | length 2.8
  L4_BOT w0.254: TP21.1@75.2,49.9 76.641,51.341 U12.10@76.641,52.135
SCK_LD: D7.1 J1.5 J3.10 U2.4 U8.1 U9.1 U10.1 | length 161.4
  L1_TOP w0.3: J3.10@62.27,14.365 64.535,12.1 68.174,12.1 69.586,13.512 69.586,24.386 v1(71.6,26.4) ; v1(66.5,69.2) 66.55,69.25 74.95,69.25 v1(75,69.3)
  L4_BOT w0.3: U10.1@46.209,37.465 43.935,37.465 43.3,38.1 43.3,45.964 46.209,48.873 U9.1@46.209,53.162 43.923,53.162 43.214,53.871 43.214,61.575 46.209,64.57 U8.1@46.209,68.5 ; U8.1@46.209,68.859 46.184,68.834 46.184,68.5 43.701,68.5 43.35,68.851 43.35,71.422 44.928,73 66.62,73 68.132,71.488 72.119,71.488 74.25,69.357 74.943,69.357 v1(75,69.3) 75.621,69.3 75.991,69.67 U2.4@75.991,70.73 ; v1(66.5,69.2) 66.5,67.728 67.4,66.828 67.4,29.4 70.4,26.4 72.822,26.4 D7.1@72.872,26.35 ; D7.1@72.897,26.35 73.997,25.25 74.95,25.25 J1.5@75.2,25
SDO_1: R38.2 TP16.1 U8.22 U9.3 | length 10.7
  L4_BOT w0.35: R38.2@46.721,59.817 46.721,59.767 47.509,58.98 U9.3@47.509,53.162 ; R38.2@46.721,59.867 47.509,60.654 47.509,62.646 U8.22@47.509,63.221
SDO_2: R41.2 TP17.1 U9.22 U10.3 | length 10.8
  L4_BOT w0.35: R41.2@46.721,43.942 46.692,43.972 R41.2@46.685,43.972 ; U10.3@47.509,37.465 TP17.1@47.509,42.254 46.821,42.942 46.821,43.836 R41.2@46.685,43.972 ; U9.22@47.509,47.523 47.509,44.716 47.012,44.219 46.932,44.219 R41.2@46.685,43.972
SDO_3: R43.2 U10.22 | length 2.5
  L4_BOT w0.35: U10.22@47.509,31.826 47.509,30.296 48.184,29.621 R43.2@48.184,29.591
SW_INT_CS: D6.2 J1.8 J3.16 U8.24 U9.24 U10.24 | length 111.5
  L1_TOP w0.25: v1(46.2,30.9) 46.928,31.628 55.095,31.628 v1(55.11,31.613)
  L1_TOP w0.3: v1(45.9,62.1) 47.508,63.708 v1(54.139,63.708) ; v1(46.2,46.5) 47.669,47.969 52.469,47.969 53.96,49.46 v1(53.984,49.46) ; J3.16@58.46,14.365 63.025,9.8 67.995,9.8 71.086,12.891 71.086,19.114 71.568,19.596 v1(71.568,19.677)
  L4_BOT w0.25: v1(45.9,62.1) 45.9,62.162 46.159,62.421 46.159,63.171 U8.24@46.209,63.221 ; v1(46.2,30.9) 46.204,30.905 46.204,31.822 U10.24@46.209,31.826 ; v1(46.2,46.5) 46.204,46.505 46.204,47.493 U9.24@46.209,47.498
  L4_BOT w0.3: v1(54.139,63.708) 54.139,63.627 53.984,63.472 v1(53.984,49.46) 53.965,49.441 53.965,43.62 55.132,42.453 55.132,31.635 v1(55.11,31.613) 55.11,31.576 64.794,21.892 66.908,21.892 69.123,19.677 v1(71.568,19.677) 71.568,19.724 72.847,21.003 D6.2@72.872,21.003 73.119,21.25 J1.8@75.2,21.25
  L4_BOT w0.35: U9.24@46.209,47.498 U9.24@46.209,47.523
VREF_DAC_EXT: C59.2 FB2.1 TP22.1 U12.11 U12.13 | length 2.5
  L4_BOT w0.3: TP22.1@69,53.1 69.135,53.1 69.335,53.3 71.4,53.3
VREF_DAC_INT: C25.2 FB1.1 TP9.1 U2.11 U2.13 | length 2.8
  L4_BOT w0.2: TP9.1@68.9,66.6 69.062,66.6 69.262,66.4 71.619,66.4
pads on no net: J2.8 J2.10 J3.15 J3.18 J3.19 J3.22 LD1.3 LD2.3 LD3.3 LD4.3 LD5.3 LD6.3 LD7.3 LD8.3 LD9.3 LD10.3 LD11.3 LD12.3 LD13.3 LD14.3 LD15.3 LD16.3 LD17.3 LD18.3 LD19.3 LD20.3 LD21.3 LD22.3 LD23.3 LD24.3 LD25.2 LD26.2 LD27.2 LD28.2 LD29.2 LD30.2 LD31.2 LD32.2 U1.2 U1.3 U1.5 U2.2 U2.6 U2.7 U12.2 U12.6 U12.7

## Polygon pours and split planes (outlines as drawn)
GND on L4_BOT "GND_POUR" (solid, remove dead copper, pour order 65): 0,3 0,77 cw(c3,77) 3,80 79,80 cw(c79,77) 82,77 82,3 cw(c79,3) 79,0 3,0 cw(c3,3)
NetQ1_2 on L4_BOT "NONET_L-01_P-001" (solid, pour order 68): 42.25,26.73 43.886,26.73 43.886,25.89 42.25,25.89
12V_EXP on L4_BOT "NONET_L-01_P-001" (solid, pour order 67): 44.584,17.368 42.658,17.368 42.658,18.208 44.584,18.208
12V_EXP on L4_BOT "NONET_L-01_P-001" (solid, pour order 66): 44.584,7.014 42.658,7.014 42.658,7.854 44.584,7.854
NetR24_1 on L4_BOT "NONET_L-01_P-001" (solid, pour order 52): 42.707,12.145 42.697,12.155 42.697,14.687 42.707,14.697 43.836,14.696 43.846,14.687 43.846,12.155 43.836,12.145 43.517,12.145 43.507,12.155 43.507,12.927 ccw(c43.444,12.928) 43.444,12.991 43.104,12.991 ccw(c43.104,12.924) 43.037,12.924 43.037,12.155 43.027,12.145
NetQ2_2 on L4_BOT "NONET_L-01_P-001" (solid, pour order 63): 42.25,16.376 43.886,16.376 43.886,15.536 42.25,15.536
12V_EXP on L4_BOT "NONET_L-01_P-001" (solid, pour order 61): 43.829,7.794 43.846,7.777 43.846,7.111 43.829,7.094 42.707,7.094 42.697,7.104 42.697,7.777 42.714,7.794
NetR3_2 on L4_BOT "NONET_L-01_P-001" (solid, pour order 54): 43.836,21.599 43.846,21.589 43.846,19.058 43.836,19.048 42.707,19.048 42.697,19.058 42.697,21.589 42.707,21.599 43.027,21.599 43.037,21.589 43.037,20.817 ccw(c43.1,20.817) 43.1,20.754 43.44,20.754 ccw(c43.44,20.821) 43.507,20.821 43.507,21.589 43.517,21.599
NetR6_1 on L4_BOT "NONET_L-01_P-001" (solid, pour order 53): 42.707,22.499 42.697,22.509 42.697,25.04 42.707,25.05 43.836,25.05 43.846,25.04 43.846,22.509 43.836,22.499 43.517,22.499 43.507,22.509 43.507,23.281 ccw(c43.444,23.281) 43.444,23.344 43.104,23.344 ccw(c43.104,23.277) 43.037,23.277 43.037,22.509 43.027,22.499
NetR21_2 on L4_BOT "NONET_L-01_P-001" (solid, pour order 47): 43.836,11.245 43.846,11.235 43.846,8.704 43.836,8.694 42.707,8.694 42.697,8.704 42.697,11.235 42.707,11.245 43.027,11.245 43.037,11.235 43.037,10.463 ccw(c43.1,10.463) 43.1,10.4 43.44,10.4 ccw(c43.44,10.467) 43.507,10.467 43.507,11.235 43.517,11.245
NetC1_1 on L4_BOT "NONET_L-01_P-001" (solid, pour order 3): 10.299,26.401 8.801,26.401 ccw(c8.801,26.2) 8.6,26.2 8.6,25 cw(c8.5,25) 8.5,24.9 4.563,24.9 ccw(c4.563,24.683) 4.346,24.683 4.346,24.208 ccw(c4.76,24.208) 4.467,23.915 5.031,23.351 cw(c4.383,22.702) 5.3,22.702 5.3,21.626 cw(c4.271,21.626) 4.998,20.898 3.241,19.141 ccw(c3.824,18.559) 3,18.559 3,14.3 ccw(c3.4,14.3) 3.4,13.9 7,13.9 ccw(c7,14.5) 7.6,14.5 7.6,19.199 cw(c8.777,19.199) 7.945,20.031 8.649,20.736 ccw(c7.802,21.583) 9,21.583 9,23.066 cw(c9.578,23.066) 9.169,23.475 10.333,24.639 ccw(c9.932,25.041) 10.5,25.041 10.5,26.2 ccw(c10.299,26.2)
VREF_DAC_EXT on L4_BOT "NONET_L-01_P-001" (solid, pour order 42): 71.835,54.737 75.763,54.737 cw(c75.763,54.3) 76.2,54.3 76.2,51.647 cw(c76.064,51.646) 76.063,51.51 75.919,51.51 cw(c75.919,51.639) 75.79,51.639 75.79,52.697 ccw(c75.517,52.697) 75.71,52.89 ccw(c75.445,52.626) 75.445,53 75.068,53 ccw(c75.068,52.837) 74.952,52.952 74.941,52.941 ccw(c75.122,52.76) 74.866,52.76 74.866,51.685 cw(c74.692,51.685) 74.815,51.561 cw(c74.691,51.684) 74.691,51.51 74.619,51.51 cw(c74.618,51.612) 74.516,51.613 74.516,52.585 ccw(c74.277,52.585) 74.446,52.754 74.371,52.829 ccw(c73.959,52.418) 73.959,53 73.2,53 ccw(c73.2,52.8) 73,52.8 73,52.2 cw(c72.7,52.2) 72.7,51.9 71.4,51.9 cw(c71.4,52.1) 71.2,52.1 71.2,54.4 cw(c71.537,54.4) 71.537,54.737
VREF_DAC_INT on L4_BOT "NONET_L-01_P-001" (solid, pour order 43): 71.835,67.682 75.763,67.682 cw(c75.763,67.245) 76.2,67.245 76.2,64.592 cw(c76.064,64.591) 76.063,64.455 75.919,64.455 cw(c75.919,64.584) 75.79,64.584 75.79,65.642 ccw(c75.517,65.642) 75.71,65.835 ccw(c75.445,65.571) 75.445,65.945 75.068,65.945 ccw(c75.068,65.782) 74.952,65.897 74.941,65.886 ccw(c75.122,65.705) 74.866,65.705 74.866,64.63 cw(c74.692,64.63) 74.815,64.506 cw(c74.691,64.629) 74.691,64.455 74.619,64.455 cw(c74.618,64.557) 74.516,64.558 74.516,65.53 ccw(c74.277,65.53) 74.446,65.699 74.371,65.774 ccw(c73.959,65.363) 73.959,65.945 73.2,65.945 ccw(c73.2,65.745) 73,65.745 73,65.145 cw(c72.7,65.145) 72.7,64.845 71.4,64.845 cw(c71.4,65.045) 71.2,65.045 71.2,67.345 cw(c71.537,67.345) 71.537,67.682
GND on L4_BOT "NONET_L-01_P-001" (solid, pour order 40): 24.055,15.37 20.37,15.37 19.1,14.1 15.689,14.1 15.689,13.468 18.035,13.468 19.032,13.468 20.302,12.198 24.055,12.198
GND on L4_BOT "NONET_L-01_P-001" (solid, pour order 38): 8.44,11.981 8.44,5.12 5.757,5.12 5.3,5.577 5.3,11.445 5.837,11.981
GND on L4_BOT "NONET_L-01_P-001" (solid, pour order 37): 20.92,28.677 14.059,28.677 14.059,31.6 20.92,31.6
12V_EXP on L4_BOT "NONET_L-01_P-001" (solid, pour order 17): 8.8,27.7 21.9,27.7 cw(c21.9,26.8) 22.8,26.8 22.8,24.4 cw(c22.1,24.4) 22.1,23.7 14.583,23.7 cw(c14.583,25.132) 13.57,24.119 12.29,25.4 11.565,26.124 ccw(c10.176,24.735) 10.176,26.7 8.8,26.7 cw(c8.8,26.9) 8.6,26.9 8.6,27.5 cw(c8.8,27.5)
3V3 on L4_BOT "L4_BOT-3V3" (solid, pour order 12): 18.5,14.8 18.5,16.7 ccw(c18.3,16.7) 18.3,16.9 17.6,16.9 cw(c17.6,17.2) 17.3,17.2 17.3,18.8 cw(c17.447,18.8) 17.447,18.947 18.174,18.947 ccw(c18.174,19.188) 18.414,19.189 18.401,22.814 ccw(c18.014,22.813) 18.014,23.2 14.4,23.2 ccw(c14.4,22.8) 14,22.8 14,14.9 ccw(c14.4,14.9) 14.4,14.5 18.2,14.5 ccw(c18.2,14.8)
5V on L4_BOT "NONET_L-01_P-001" (solid, pour order 9): 8.5,18.5 8.5,14.083 ccw(c9.907,14.083) 8.912,13.088 9.417,12.583 cw(c8.011,11.176) 10,11.176 10,5.741 ccw(c10.824,5.741) 10.241,5.159 11.217,4.183 cw(c10.292,3.258) 11.6,3.258 11.6,2.7 ccw(c11.9,2.7) 11.9,2.4 19.2,2.4 ccw(c19.2,2.7) 19.5,2.7 19.5,7.059 ccw(c18.701,7.059) 19.266,7.624 19.124,7.766 ccw(c18.559,7.201) 18.559,8 17.8,8 cw(c17.8,8.2) 17.6,8.2 17.6,9.476 cw(c18.141,9.476) 17.758,9.858 18.429,10.529 ccw(c18.017,10.941) 18.6,10.941 18.6,12.7 ccw(c18.3,12.7) 18.3,13 14.441,13 cw(c14.441,13.824) 13.859,13.241 12.941,14.159 cw(c13.766,14.983) 12.6,14.983 12.6,18.4 ccw(c12,18.4) 12,19 9,19 ccw(c9,18.5)
3V3 on L2_SIGNAL "3V3_L02_P044" (solid, pour order 44): 69.5,27.3 69.5,34.5 69.5,77.4 50.2,77.4 44.5,71.7 44.5,30.58 37.32,23.4 14.776,23.4 14,22.624 14,18.4 16.66,18.4 18.06,19.8 43.2,19.8 46.011,22.611 50.7,27.3
12V_EXP on L2_SIGNAL "NONET_L-01_P-001" (solid, remove dead copper, pour order 35): 44.3,73.185 44.3,30.935 37.065,23.7 14.6,23.7 13.4,22.5 13.5,22.4 13.5,18.11 17.11,18.11 18.54,19.54 43.34,19.54 50.671,26.871 69.471,26.871 69.847,27.247 69.847,77.5 74.3,77.5 80,71.8 80,50 75.8,45.8 75.8,43.3 79.6,39.5 79.6,8.1 73.2,1.7 49.3,1.7 44.6,6.4 41.6,6.4 36.9,1.7 9.5,1.7 1.9,9.3 1.9,38.4 6.5,43 6.5,45.7 2.4,49.8 2.4,71.6 8.7,77.9 40.894,77.9
GND on L3_GND "GND_POUR" (solid, remove dead copper, pour order 36): 0,3 0,77 cw(c3,77) 3,80 79,80 cw(c79,77) 82,77 82,3 cw(c79,3) 79,0 3,0 cw(c3,3)
GND on L1_TOP "GND_POUR" (solid, remove dead copper, pour order 46): 0,3 0,77 cw(c3,77) 3,80 79,80 cw(c79,77) 82,77 82,3 cw(c79,3) 79,0 3,0 cw(c3,3)

## Keep-outs
Keep-Out Layer:
  lines w0.2: 82,77 ccw(c79,77) 79,80 3,80 ccw(c3,77) 0,77 0,3 ccw(c3,3) 3,0 79,0 ccw(c79,3) 82,3 82,77 ; 82,77 82,77

## Silkscreen, mask and mechanical layers (free items; w line width, h text height)
Top Overlay:
  drawing of 81 lines, arcs and shapes, not listed
  text "BEE-PC_LDA V1.3" at 17.396,9.757 h1.5
  text "Checked by: Bao Bui" at 16.541,7.912 h1.5
  text "Approved by: Vu Pham" at 15.791,6.088 h1.5
  text "Designed by: Duy Nguyen" at 14.86,4.257 h1.5
Bottom Overlay:
  text "DAC_INT" at 80.281,72.196 h1.2
  text "VREF" at 67.425,64.716 h1.2 r270
  text "DAC" at 67.439,62.207 h1.2 r270
  text "DAC_EXT" at 80.281,61.086 h1.2
  text "EXT" at 53.012,15.139 h1.2
  text "INT" at 53.012,13.939 h1.2
  text "CONN_INT" at 80.174,12.146 h1.2
  text "CONN_EXT" at 76.436,6.136 h1.2
  text "GND" at 49.017,4.63 h1.2
  text "5V" at 21.516,2.247 h1.2